# Altium PCB PCB_KeyScreen.PcbDoc
Units mil, origin at the board's own origin, x right, y up, seen from the top; angles counter-clockwise.
Board outline 2430 x 3975 mil, 2 copper layers (Top Layer, Bottom Layer); 34 components, 26 nets, 148 pads, 12 vias.
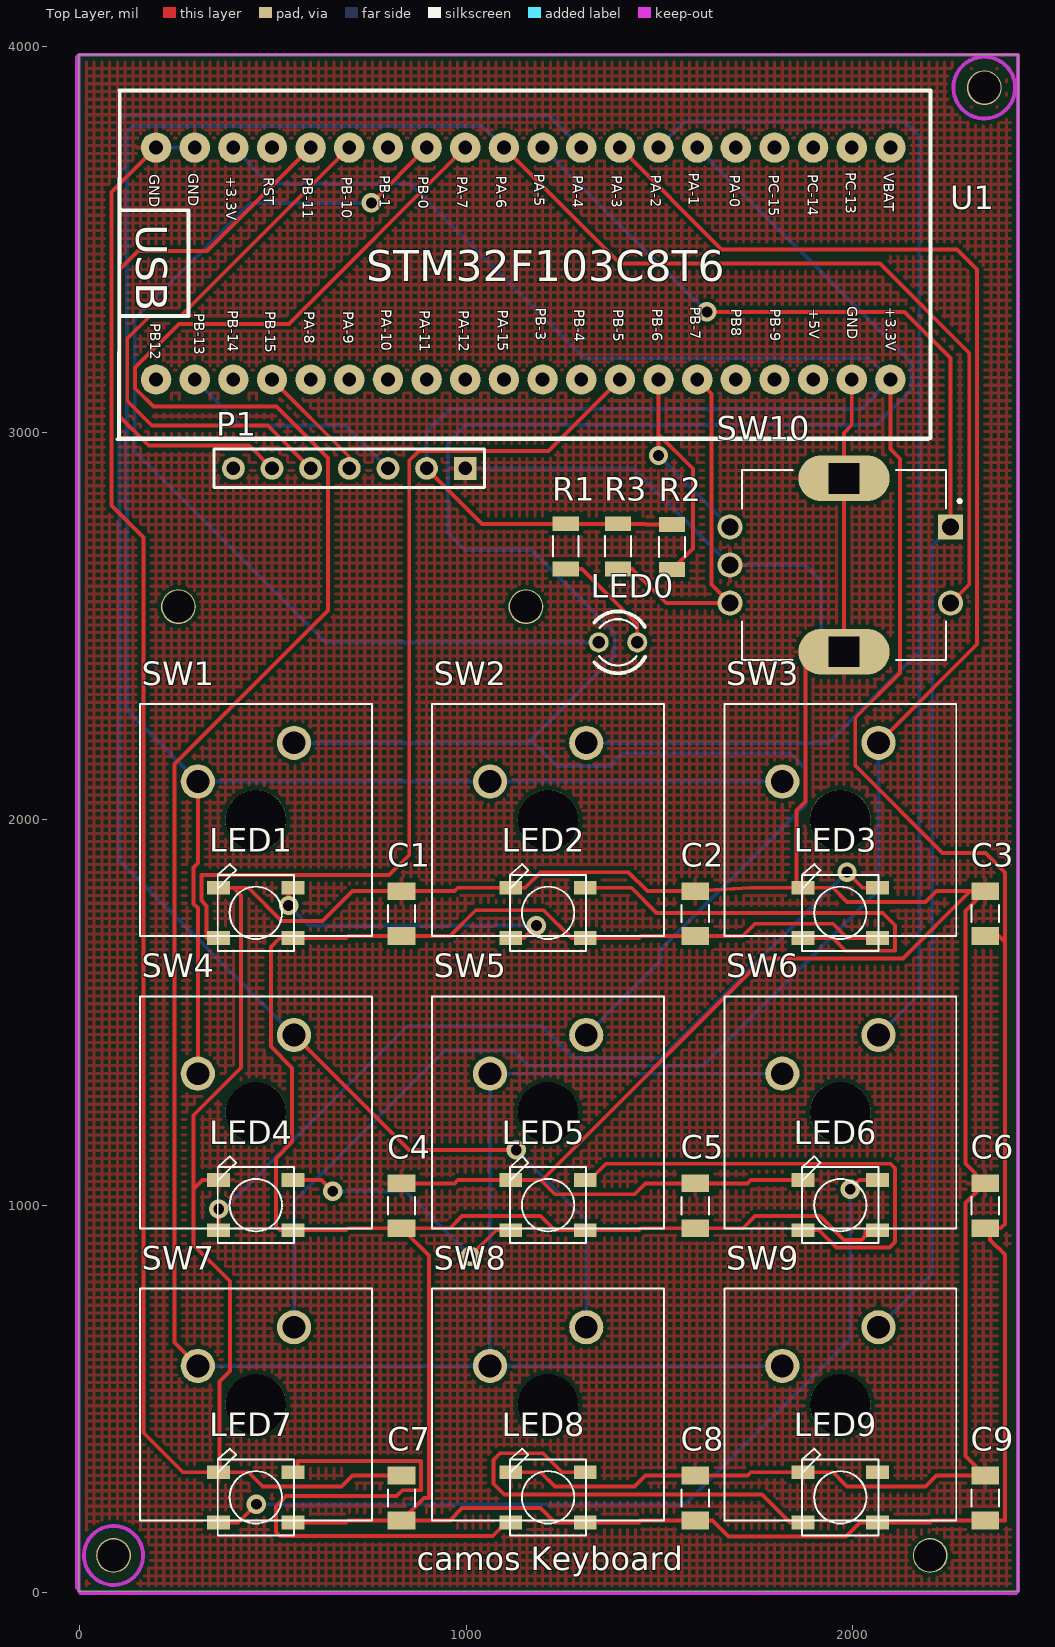
[diagram p0: Top Layer view]
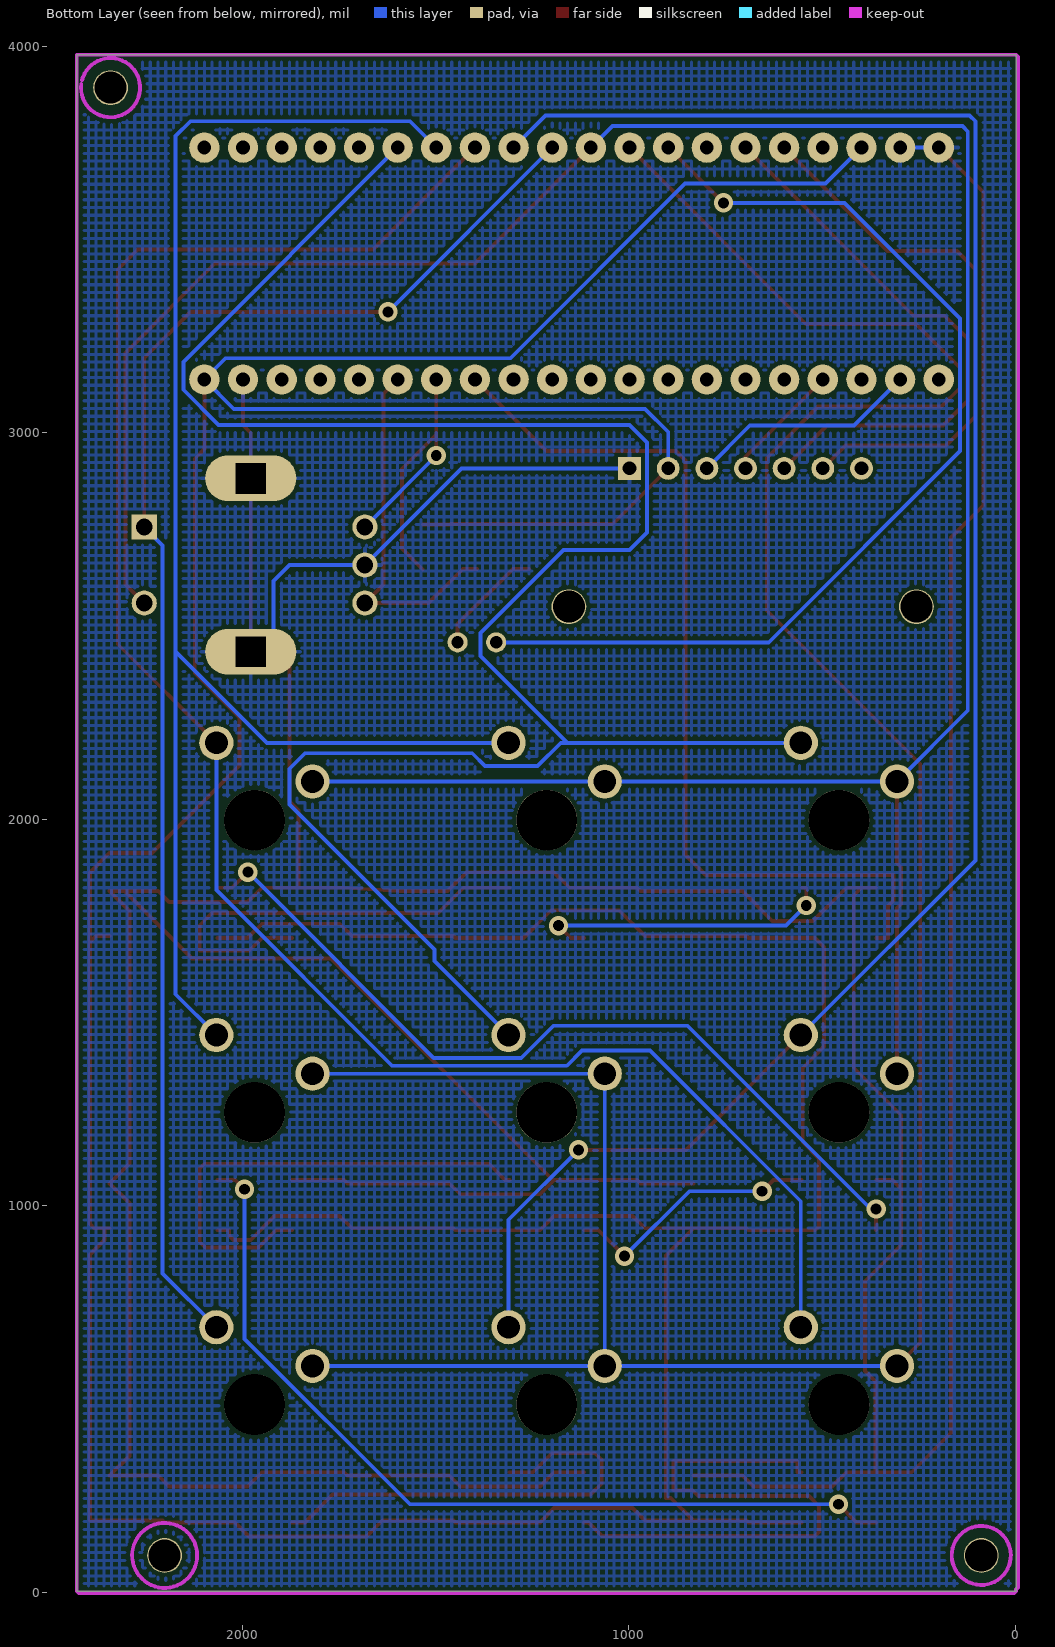
[diagram p1: Bottom Layer view, seen from below]
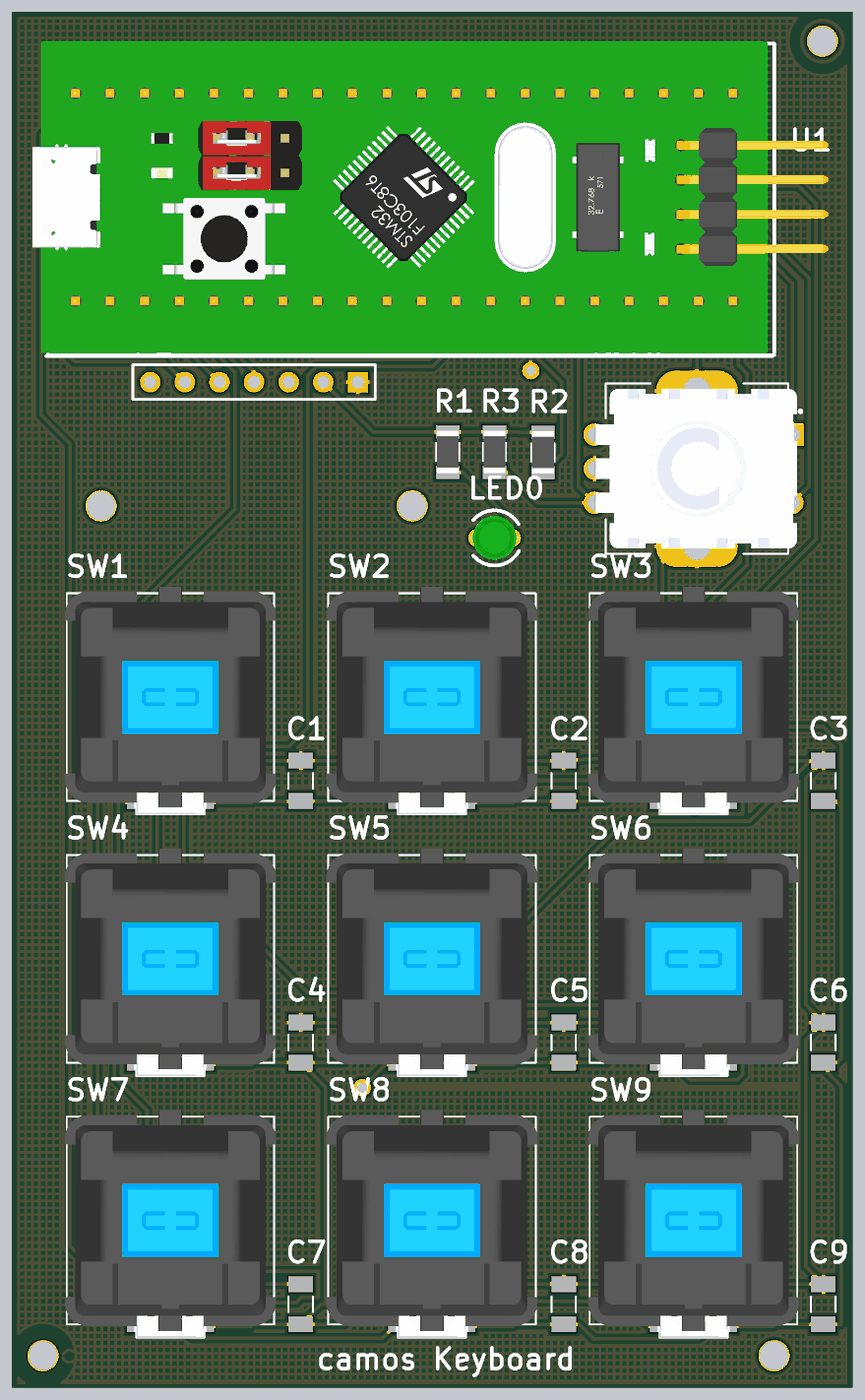
[diagram p2: 3D render of the assembled board from above, using the file's embedded part models]

## Layer stack, top to bottom
Top Solder: solder mask 0.4, Solder Resist, Dk 3.5
Top Layer: signal copper 1.4
Dielectric 1: dielectric 12.6, FR-4, Dk 4.8
Bottom Layer: signal copper 1.4
Bottom Solder: solder mask 0.4, Solder Resist, Dk 3.5

## Board outline
-2.5,2.5 -2.5,3977.5 2427.5,3977.5 2427.5,2.5
board region "Default Layer Stack Region": -2.5,2.5 -2.5,3977.5 2427.5,3977.5 2427.5,2.5
board region "Default Layer Stack Region": -2.5,2.5 -2.5,3977.5 2427.5,3977.5 2427.5,2.5
board region "Layer Stack Region 1": -2.5,2.5 -2.5,3977.5 2427.5,3977.5 2427.5,2.5

## Design rules (kind name [scope] priority, off if disabled: settings)
Clearance [All] p1: gap=10 ignorepadtopadclearanceinfootprint=FALSE except(0: Arc-Hole Track-Hole SMDPad-Hole THPad-Hole Via-Hole Fill-Hole Poly-Hole Region-Hole Text-Hole)
PolygonConnect [All] p1: connectstyle=Relief reliefconductorwidth=10 reliefentries=4 polygonreliefangle="90 Angle" airgapwidth=10
RoutingVias [All] p1: holewidth=28 width=50 viastyle="Through Hole" minholewidth=28 minwidth=50 maxholewidth=28 maxwidth=50
SolderMaskExpansion [All] p1: expansion=4 istentingtop=FALSE
Width [All] p1: maxlimit=10 minlimit=10 preferedwidth=10
30 further rules are at their usual default settings.

## Components (designator, comment, footprint, x,y, rotation, side; value= is the part's Value field where it differs from the comment)
C1 "C1206" CAPC3216X110N 832.5,1755.73 r270 top
C2 "C1206" CAPC3216X110N 1592.5,1755.73 r270 top
C3 "C1206" CAPC3216X110N 2342.5,1755.73 r270 top
C4 "C1206" CAPC3216X110N 832.5,999.73 r270 top
C5 "C1206" CAPC3216X110N 1592.5,999.73 r270 top
C6 "C1206" CAPC3216X110N 2342.5,999.73 r270 top
C7 "C1206" CAPC3216X110N 832.5,243.73 r270 top
C8 "C1206" CAPC3216X110N 1592.5,243.73 r270 top
C9 "C1206" CAPC3216X110N 2342.5,243.73 r270 top
LED0 "3mm" LED3MM 1392.5,2457.5 r180 top
LED1 "WS2812B" WS2812B 455.65,1757.5 r0 top
LED2 "WS2812B" WS2812B 1211.65,1757.5 r0 top
LED3 "WS2812B" WS2812B 1967.65,1757.5 r0 top
LED4 "WS2812B" WS2812B 455.65,1001.5 r0 top
LED5 "WS2812B" WS2812B 1211.65,1001.5 r0 top
LED6 "WS2812B" WS2812B 1967.65,1001.5 r0 top
LED7 "WS2812B" WS2812B 455.65,245.5 r0 top
LED8 "WS2812B" WS2812B 1211.65,245.5 r0 top
LED9 "WS2812B" WS2812B 1967.65,245.5 r0 top
P1 "Header 7" HDR1X7 997.5,2907.5 r180 top
R1 "220" RESC3116X65N 1257.5,2705.77 r270 top
R2 "10k" RESC3116X65N 1532.5,2704.23 r270 top
R3 "10k" RESC3116X65N 1392.5,2705.77 r270 top
SW1 "MX1A-11NN" CHERRY_MX1A-11NN_SWITCH 455.65,1997.5 r0 top
SW2 "MX1A-11NN" CHERRY_MX1A-11NN_SWITCH 1211.65,1997.5 r0 top
SW3 "MX1A-11NN" CHERRY_MX1A-11NN_SWITCH 1967.65,1997.5 r0 top
SW4 "MX1A-11NN" CHERRY_MX1A-11NN_SWITCH 455.65,1241.5 r0 top
SW5 "MX1A-11NN" CHERRY_MX1A-11NN_SWITCH 1211.65,1241.5 r0 top
SW6 "MX1A-11NN" CHERRY_MX1A-11NN_SWITCH 1967.65,1241.5 r0 top
SW7 "MX1A-11NN" CHERRY_MX1A-11NN_SWITCH 455.65,485.5 r0 top
SW8 "MX1A-11NN" CHERRY_MX1A-11NN_SWITCH 1211.65,485.5 r0 top
SW9 "MX1A-11NN" CHERRY_MX1A-11NN_SWITCH 1967.65,485.5 r0 top
SW10 "PEC11R-4215F-S0024" XDCR_PEC11R-4215F-S0024 1977.5,2657.5 r270 top
U1 "STM32F103C8T6_Board" PCBComponent_1 42.5,3902.5 r0 top

## Footprints (in the part's own frame and the unit in brackets; to place one, negate y for a bottom-side part, rotate by r counter-clockwise, add the part's x,y. Pads: shape width x height; smd on the part's side, far side on the other; paste and mask are expansions set on the pad)
CAPC3216X110N [mm]
  rect 1.16x1.82 smd: 1(-1.475,0) 2(1.475,0)
  silkscreen extent -0.57,-0.9 0.57,0.9
CHERRY_MX1A-11NN_SWITCH [mm]
  round 2.25 hole 1.5: P$1(2.51,5.08) P$2(-3.81,2.54)
  round 3.988 hole 3.988 unplated: ""(0,0)
  silkscreen extent -7.62,-7.62 7.62,7.62, body extent -7.75,-8.1 7.75,8.1, height 15.24
HDR1X7 [mm] "Connector; Header; 7 Position"
  rect 1.5x1.5 hole 0.9: 1(0,0)
  round 1.5 hole 0.9: 2(2.54,0) 3(5.08,0) 4(7.62,0) 5(10.16,0) 6(12.7,0) 7(15.24,0)
  silkscreen extent -1.27,-1.27 16.51,1.27
LED3MM [mil]
  round 52 hole 32: A(-50,0) K(50,0)
  silkscreen extent -71,-80 61,80, body extent -63,-63 63,63, height 240
PCBComponent_1 [mil]
  round 78.74 hole 35.4 paste+0 mask+2: 1(2055,-165) 2(1955,-165) 3(1855,-165) 4(1755,-165) 5(1655,-165) 6(1555,-165) 7(1455,-165) 8(1355,-165) 9(1255,-165) 10(1155,-165) 11(1055,-165) 12(955,-165) 13(855,-165) 14(755,-165) 15(655,-165) 16(555,-165) 17(455,-165) 18(355,-165) 19(255,-165) 20(155,-165) 21(155,-765) 22(255,-765) 23(355,-765) 24(455,-765) 25(555,-765) 26(655,-765) 27(755,-765) 28(855,-765) 29(955,-765) 30(1055,-765) 31(1155,-765) 32(1255,-765) 33(1355,-765) 34(1455,-765) 35(1555,-765) 36(1655,-765) 37(1755,-765) 38(1855,-765) 39(1955,-765) 40(2055,-765)
  Top Layer lines w10: 1952,-151 1960,-159
  silkscreen extent 54,-920 2158,-17, body extent 14,-911 2314,-11, height 554
RESC3116X65N [mm]
  rect 0.97x1.73 smd: 1(-1.48,0) 2(1.48,0)
  silkscreen extent -0.67,-0.85 0.67,0.85, body extent -1.55,-0.8 1.55,0.8, height 0.65
WS2812B [mm]
  rect 1.5x0.9 smd: 1-VDD(2.45,-1.65) 2-DOUT(2.45,1.65) 3-GND(-2.45,1.65) 4-DIN(-2.45,-1.65)
  silkscreen extent -2.5,-2.5 2.5,3.2, body extent -2.7,-2.5 2.7,2.5, height 1.62
XDCR_PEC11R-4215F-S0024 [mm]
  rect 1.65x1.65 hole 1.1: 1(-2.5,7)
  round 1.65 hole 1.1: 2(2.5,7) A(-2.5,-7.5) B(2.5,-7.5) COM(0,-7.5)
  oval 3x6 hole 2 square: S1(-5.7,0) S2(5.7,0)
  silkscreen extent -6.25,-6.7 6.25,7.7, body extent -5.85,-7.5 5.85,7.35, height 26.6

## Part data
C1 C2 C3 C4 C5 C6 C7 C8 C9: library part C1206C105K5RACTU, "1ÂµF Â±10% 50V Ceramic Capacitor X7R 1206 _3216 Metric_", Package="3216 KEMET", Digi-Key_Part_Number=399-8147-1-ND, Digi-Key_Purchase_URL=https://www.digikey.com/product-detail/en/kemet/C1206C105K5RACTU/399-8147-1-ND/3471870?utm_source=snapeda&utm_medium=aggregator&utm_campaign=symbol, MF=KEMET, MP=C1206C105K5RACTU, SnapEDA_Link=https://www.snapeda.com/parts/C1206C105K5RACTU/KEMET/view-part/357507/?ref=snap
LED0: library part TLLG4400, "Green 569nm LED Indication - Discrete 1.9V Radial", Package=None, Availability="In Stock", Check_prices=https://www.snapeda.com/parts/TLLG4400/Vishay/view-part/?ref=eda, MF="Vishay Semiconductors", MP=TLLG4400, Price=None, Purchase-URL=https://pricing.snapeda.com/search/part/TLLG4400/?ref=eda, SnapEDA_Link=https://www.snapeda.com/parts/TLLG4400/Vishay/view-part/?ref=snap
LED1 LED2 LED3 LED4 LED5 LED6 LED7 LED8 LED9: "Raspberry Pi HAT _40 pin_ Wheeled Robotics Kit", Package=None, Availability=Unavailable, MF="SparkFun Electronics", MP=WS2812B, Price=None, SnapEDA_Link=https://www.snapeda.com/parts/WS2812B/Worldsemi/view-part/1038297/?ref=snap
P1: "Header, 7-Pin", LatestRevisionDate=17-Jul-2002, LatestRevisionNote="Re-released for DXP Platform.", Publisher="Altium Limited"
R1 R2 R3: library part Res-SMD, "Resistor", Manufacturer="Generic Components", Class=Passive, Published=08/06/2000, Publisher="Altium Hobart Technology Centre"
SW1 SW2 SW3 SW4 SW5 SW6 SW7 SW8 SW9: "Pushbutton Switch SPST-NO Keyswitch Panel Mount, Front", Package=None, Availability="In Stock", Check_prices=https://www.snapeda.com/parts/MX1A-11NN/Cherry/view-part/?ref=eda, MF=Cherry, MP=MX1A-11NN, Price=None, Purchase-URL=https://pricing.snapeda.com/search/part/MX1A-11NN/?ref=eda, SnapEDA_Link=https://www.snapeda.com/parts/MX1A-11NN/Cherry/view-part/?ref=snap
SW10: "Incremental Encoder, 12 Mm, Contact Rating 10 Ma - 5 Vdc", Package=None, Availability=Unavailable, MP=PEC11R-4215F-S0024, Price=None
U1: library part "STM32F103C8T6_Blue pill", Manufacturer Part=STM32Duino, Contributor=Johan_a, spicePre=U, spiceSymbolName="STM32F103C8T6_Development_Board copy"

## Free pads (board coordinates)
  round 90 hole 83: 1(1154.42,2549.71) 1(2340.28,3892.5) 2(255.28,2549.71) 3(87.5,95.17) 4(2200.28,95.17)

## Via types
v1: diameter 50, hole 28, Top Layer to Bottom Layer, 12 vias

## Nets (pads, with @x,y where several pads share a name; then routed paths per layer and width w, separated by ;. In a path a pad name is that pad's centre, name@x,y a point inside that pad or via, vN(x,y) a via of type N, cw(c..) or ccw(c..) an arc to the next point about the centre after c; other vN are vias at no path point)
A1: SW1.P$1 SW5.P$1 U1.6 | length 5563
  Bottom Layer w10: SW1.P$1 1158.5,2197.5 ; SW5.P$1 1502.5,1633.53 1502.5,1662.5 1877.5,2037.5 1877.5,2130.5 1837.5,2170.5 1404.5,2170.5 1371.5,2137.5 1235.5,2137.5 1175.5,2197.5 1158.5,2197.5 ; U1.6 2151.87,3183.13 2151.87,3110.87 2060.5,3019.5 997.5,3019.5 952.5,2974.5 952.5,2741.5 997.5,2696.5 1168.5,2696.5 1383.5,2481.5 1383.5,2422.5 1158.5,2197.5
A2: SW2.P$1 SW6.P$1 U1.7 | length 4047
  Bottom Layer w10: SW2.P$1 1935.5,2197.5 2171.87,2433.87 ; U1.7 1565.5,3805.5 2133.5,3805.5 2171.87,3767.13 2171.87,2433.87 ; SW6.P$1 2171.87,1546.9 2171.87,2433.87
A3: SW3.P$1 SW7.P$1 U1.8 | length 4970.1
  Top Layer w10: U1.8 1660.85,3474.15 2269.85,3474.15 2321.5,3422.5 2321.5,2452.53 SW3.P$1
  Bottom Layer w10: SW7.P$1 554.47,1011.47 944.5,1401.5 1120.5,1401.5 1159.79,1362.21 1612.21,1362.21 2066.47,1816.47 SW3.P$1
A4: SW4.P$1 SW8.P$1 U1.9 | length 5018.8
  Top Layer w10: SW4.P$1 851.47,1144.5 v1(1129.5,1144.5)
  Bottom Layer w10: SW4.P$1 102.5,1893.47 102.5,3805.5 117.5,3820.5 1214.5,3820.5 U1.9 ; v1(1129.5,1144.5) 1310.47,963.53 SW8.P$1
A5: SW9.P$1 SW10.1 U1.10 | length 3865.9
  Top Layer w10: v1(1622.5,3312.5) 2133.5,3312.5 2253.09,3192.91 SW10.1
  Bottom Layer w10: U1.10 v1(1622.5,3312.5) ; SW9.P$1 2205.5,824.53 2205.5,2708.34 SW10.1
A6: SW1.P$2 SW2.P$2 SW3.P$2 SW4.P$2 SW10.2 U1.11 | length 7130.4
  Top Layer w10: SW4.P$2 305.65,1769.74 294.67,1780.73 294.67,1875.18 305.65,1886.16 SW1.P$2 ; U1.11 1397.5,3437.5 2070.5,3437.5 2301.5,3206.5 2301.5,2607.48 SW10.2
  Bottom Layer w10: U1.11 1041.5,3793.5 136.5,3793.5 122.5,3779.5 122.5,2280.65 SW1.P$2 SW2.P$2 SW3.P$2
A7: SW5.P$2 SW6.P$2 SW7.P$2 SW8.P$2 SW9.P$2 U1.12 | length 7280
  Top Layer w10: SW7.P$2 245.5,645.65 245.5,2142.5 642.5,2539.5 642.5,2934.5 509.5,3067.5 190.5,3067.5 143.13,3114.87 143.13,3168.13 256.5,3281.5 541.5,3281.5 U1.12
  Bottom Layer w10: SW7.P$2 SW8.P$2 ; SW9.P$2 SW8.P$2 ; SW6.P$2 SW5.P$2 1061.65,1243.65 1061.5,1243.5 1061.5,585.65 SW8.P$2
DC: P1.6 U1.16 | length 1455.5
  Top Layer w10: P1.6 438.5,2966.5 178.5,2966.5 103.13,3041.87 103.13,3422.5 150.39,3469.76 329.76,3469.76 U1.16
GND: C1.1 C2.1 C3.1 C4.1 C5.1 C6.1 C7.1 C8.1 C9.1 LED1.3-GND LED2.3-GND LED3.3-GND LED4.3-GND LED5.3-GND LED6.3-GND LED7.3-GND LED8.3-GND LED9.3-GND P1.1 SW10.COM SW10.S1 SW10.S2 U1.19 U1.20 U1.39 | length 16227.8
  Top Layer w10: U1.20 82.5,3622.5 82.5,2811.5 165.5,2728.5 165.5,412.46 267.5,310.46 LED7.3-GND LED7.3-GND@361.5,310.46 ; LED4.3-GND 317.5,1066.46 294.5,1043.46 ; LED1.3-GND 397.5,1822.46 ; C7.1 705.5,301.8 677.2,273.5 473.5,273.5 436.54,310.46 LED7.3-GND@361.5,310.46 ; C4.1 969.5,1057.8 978.16,1066.46 LED5.3-GND ; LED8.3-GND 1192.5,310.46 1229.46,273.5 1435.5,273.5 1463.8,301.8 C8.1 1727.5,301.8 1736.16,310.46 LED9.3-GND 1948.5,310.46 1985.46,273.5 2188.5,273.5 2216.8,301.8 C9.1 2291.5,352.8 2291.5,1006.8 C6.1 2291.5,1108.8 2291.5,1762.8 C3.1 2303.8,1813.8 ; LED6.3-GND 1736.16,1066.46 1727.5,1057.8 C5.1 1463.8,1057.8 1435.5,1029.5 1229.46,1029.5 1194.48,1064.48 ; U1.39 1997.5,3019.5 1977.5,2999.5 SW10.S1 SW10.S2 1877.5,2433.09 1877.5,2045.5 1854.15,2022.15 LED3.3-GND@1854.15,1822.46 ; 294.5,1043.46 294.5,1233.99 417.5,1356.99 417.5,1802.46 397.5,1822.46 ; 294.5,1043.46 294.5,898.5 388.5,804.5 388.5,571.99 361.5,544.99 LED7.3-GND@361.5,310.46 ; 397.5,1822.46 436.54,1822.46 522.5,1736.5 628.2,1736.5 705.5,1813.8 C1.1 969.5,1813.8 978.16,1822.46 LED2.3-GND 1152.46,1822.46 1192.5,1862.5 1419.8,1862.5 1468.5,1813.8 C2.1 1736.16,1822.46 LED3.3-GND@1854.15,1822.46 ; LED5.3-GND 1194.48,1064.48 ; LED5.3-GND 1192.5,1066.46 1194.48,1064.48 ; 1194.48,1064.48 1769.5,1639.5 2129.5,1639.5 2303.8,1813.8 ; LED3.3-GND@1854.15,1822.46 LED3.3-GND 1948.5,1822.46 1985.46,1785.5 2188.5,1785.5 2216.8,1813.8 2303.8,1813.8
  Bottom Layer w10: U1.20 U1.19 ; P1.1 1432.22,2907.5 SW10.COM 1877.5,2657.5 1918.5,2616.5 1918.5,2433.09 SW10.S2
LED: LED0.K U1.13 | length 2686.1
  Top Layer w10: v1(754.5,3594.5) U1.13
  Bottom Layer w10: v1(754.5,3594.5) 441.5,3594.5 142.5,3295.5 142.5,2952.5 637.5,2457.5 LED0.K
NetLED0_A: LED0.A R1.2 | length 291.2
  Top Layer w10: R1.2 1299.5,2647.5 1442.5,2504.5 LED0.A
NetLED1_2-DOUT: LED1.2-DOUT LED2.4-DIN | length 799.6
  Top Layer w10: v1(540.5,1776.5) 540.5,1822.46 LED1.2-DOUT ; LED2.4-DIN 1149.54,1692.54 v1(1181.5,1724.5)
  Bottom Layer w10: v1(540.5,1776.5) 592.5,1724.5 v1(1181.5,1724.5)
NetLED2_2-DOUT: LED2.2-DOUT LED3.4-DIN | length 1159.5
  Top Layer w10: LED2.2-DOUT 1427.54,1822.46 1492.5,1757.5 2077.5,1757.5 2109.5,1725.5 2109.5,1659.5 1981.54,1659.5 1948.5,1692.54 LED3.4-DIN
NetLED3_2-DOUT: LED3.2-DOUT LED4.4-DIN | length 2206.7
  Top Layer w10: LED4.4-DIN 359.5,936.54 v1(359.5,991.5) ; v1(1985,1863) 2025.54,1822.46 LED3.2-DOUT
  Bottom Layer w10: v1(359.5,991.5) 373.5,991.5 847.5,1465.5 1194.5,1465.5 1277.79,1382.21 1504.21,1382.21 v1(1985,1863)
NetLED4_2-DOUT: LED4.2-DOUT LED5.4-DIN | length 672.4
  Top Layer w10: LED4.2-DOUT 625.54,1066.46 v1(654.5,1037.5) ; v1(1010.5,869.54) 1077.5,936.54 LED5.4-DIN
  Bottom Layer w10: v1(654.5,1037.5) 842.54,1037.5 v1(1010.5,869.54)
NetLED5_2-DOUT: LED5.2-DOUT LED6.4-DIN | length 1276.8
  Top Layer w10: LED5.2-DOUT 1319.5,1066.46 1361.54,1108.5 2097.5,1108.5 2109.5,1096.5 2109.5,906.5 2094.66,891.66 1957.5,891.66 1912.62,936.54 LED6.4-DIN
NetLED6_2-DOUT: LED6.2-DOUT LED7.4-DIN | length 2298.6
  Top Layer w10: LED7.4-DIN 410.15,180.54 v1(457.11,227.5) ; v1(1993.5,1042.5) 2017.46,1066.46 LED6.2-DOUT
  Bottom Layer w10: v1(457.11,227.5) 1565.5,227.5 1993.5,655.5 v1(1993.5,1042.5)
NetLED7_2-DOUT: LED7.2-DOUT LED8.4-DIN | length 1522.4
  Top Layer w10: LED7.2-DOUT 563.5,310.46 563.5,339.64 883.33,339.64 883.33,263.96 834.96,263.96 819.5,248.5 533.5,248.5 507.5,222.5 507.5,155.5 517.5,145.5 1068.46,145.5 1103.5,180.54 LED8.4-DIN
NetLED8_2-DOUT: LED8.2-DOUT LED9.4-DIN | length 1169.1
  Top Layer w10: LED8.2-DOUT 1247.54,310.46 1198.5,359.5 1087.5,359.5 1070.5,342.5 1070.5,280.5 1098.5,252.5 1765.5,252.5 1837.46,180.54 LED9.4-DIN
PB6: R2.2 SW10.A U1.34 | length 866.9
  Top Layer w10: v1(1497.5,2940.65) 1497.5,2995.5 ; U1.34 1497.5,2995.5 ; R2.2 1586.5,2699.96 1586.5,2906.5 1497.5,2995.5
  Bottom Layer w10: v1(1497.5,2940.65) SW10.A
PB7: R3.2 SW10.B U1.35 | length 939.9
  Top Layer w10: R3.2 1429.07,2647.5 1517.5,2559.07 SW10.B 1634.5,2606.8 1634.5,3100.5 U1.35
RES: P1.5 U1.15 | length 1487
  Top Layer w10: P1.5 486.5,3018.5 186.5,3018.5 123.13,3081.87 123.13,3243.13 182.5,3302.5 262.5,3302.5 U1.15
SCL: P1.3 U1.22 | length 595.3
  Bottom Layer w10: U1.22 416.5,3018.5 686.5,3018.5 P1.3
SDA: P1.4 U1.24 | length 312.8
  Top Layer w10: U1.24 697.5,2937.5 P1.4
STRIP: LED1.4-DIN U1.33 | length 2410.7
  Top Layer w10: LED1.4-DIN 328.5,1692.54 328.5,1775.67 314.67,1789.5 314.67,1855.5 800.5,1855.5 852.5,1907.5 852.5,2927.5 877.5,2952.5 1212.5,2952.5 U1.33
VCC: C1.2 C2.2 C3.2 C4.2 C5.2 C6.2 C7.2 C8.2 C9.2 LED1.1-VDD LED2.1-VDD LED3.1-VDD LED4.1-VDD LED5.1-VDD LED6.1-VDD LED7.1-VDD LED8.1-VDD LED9.1-VDD P1.2 R1.1 R2.1 R3.1 U1.18 U1.40 | length 14160.8
  Top Layer w10: LED7.1-VDD 689.5,180.54 694.62,185.66 C7.2 ; P1.2 1040.96,2764.04 R1.1 R3.1 1461.5,2764.04 1463.04,2762.5 R2.1 ; LED6.1-VDD 2033.27,936.54 2033.27,922.5 2022.44,911.66 1977.5,911.66 1915.66,973.5 1747.5,973.5 1715.66,941.66 C5.2 1452.62,941.66 1447.5,936.54 LED5.1-VDD 1229.5,936.54 1192.54,973.5 989.5,973.5 957.66,941.66 C4.2 ; LED3.1-VDD 1985.46,1692.54 1948.5,1729.5 1747.34,1729.5 1715.5,1697.66 C2.2 1452.62,1697.66 1447.5,1692.54 LED2.1-VDD 1271.93,1692.54 1199.97,1764.5 1024.5,1764.5 957.66,1697.66 C1.2 694.62,1697.66 689.5,1692.54 LED1.1-VDD 517.5,1692.54 494.5,1669.54 494.5,1411.5 549.5,1356.5 549.5,1164.5 507.5,1122.5 507.5,946.54 517.5,936.54 LED4.1-VDD 689.5,936.54 694.62,941.66 C4.2 ; U1.40 2097.5,2957.5 2122.5,2932.5 2122.5,2378.5 2006.5,2262.5 2006.5,2138.5 2232.5,1912.5 2343.5,1912.5 2393.5,1862.5 2393.5,1682.5 ; C6.2 C6.2@2355.5,941.66 ; C3.2 2378.34,1697.66 2393.5,1682.5 ; C7.2 890.81,243.96 903.33,243.96 903.33,870.83 C4.2 ; C7.2 957.66,185.66 989.5,217.5 1192.54,217.5 1229.5,180.54 LED8.1-VDD 1447.5,180.54 1452.62,185.66 C8.2 1637.34,185.66 1678.5,144.5 1982.46,144.5 2018.5,180.54 LED9.1-VDD 2200.5,180.54 2205.62,185.66 C9.2 2393.5,185.66 2393.5,873.5 2355.5,911.5 C6.2@2355.5,941.66 ; C6.2@2355.5,941.66 2382.66,941.66 2393.5,952.5 2393.5,1682.5
  Bottom Layer w10: U1.18 490.5,3644.5 853.9,3644.5 1305.9,3192.5 2042.5,3192.5 U1.40 2021.5,3061.5 957.5,3061.5 897.5,3001.5 P1.2
pads on no net: LED9.2-DOUT P1.7 SW1. SW2. SW3. SW4. SW5. SW6. SW7. SW8. SW9. U1.1 U1.2 U1.3 U1.4 U1.5 U1.14 U1.17 U1.21 U1.23 U1.25 U1.26 U1.27 U1.28 U1.29 U1.30 U1.31 U1.32 U1.36 U1.37 U1.38

## Polygon pours and split planes (outlines as drawn)
GND on Top Layer "GND_TOP" (hatched 90Degree grid 20 track 8, pour order 4): -2.5,2.5 -2.5,3977.5 2427.5,3977.5 2427.5,2.5
GND on Bottom Layer "GND_BOT" (hatched 90Degree grid 20 track 8, pour order 5): -2.5,2.5 -2.5,3977.5 2427.5,3977.5 2427.5,2.5

## Keep-outs
Top Layer:
  lines w10: 2419.95,3887.65 cw(c2340.28,3892.5) 2420.1,3892.5 ; -2.5,2.5 2.5,-2.5 2422.5,-2.5 2427.5,2.5 2427.5,3977.5 -2.5,3977.5 -2.5,2.5
Bottom Layer:
  lines w10: 2284.01,102.21 ccw(c2200.28,95.17) 2284.27,97.55 ; 2414.26,3911.66 ccw(c2340.28,3892.5) 2416.07,3902.31
Keep-Out Layer:
  lines w10: 163.87,92.45 cw(c87.5,95.17) 163.92,95.17 ; -7.5,12.5 -2.5,7.5 -2.5,2.5 2.5,-2.5 2422.5,-2.5 2427.5,2.5 2427.5,3977.5 -2.5,3977.5 -7.5,3972.5 -7.5,12.5

## Silkscreen, mask and mechanical layers (free items; w line width, h text height)
Top Overlay:
  text "camos Keyboard" at 872.5,57.5 h60

## Text inside footprints (layer, text, board x,y; h text height)
U1: Top Overlay "VBAT" at 2080.72,3672.5 h27.56 r270; Top Overlay "PC-13" at 1981.72,3673.5 h27.56 r270; Top Overlay "PC-14" at 1883.72,3668.5 h27.56 r270; Top Overlay "PC-15" at 1782.72,3667.5 h27.56 r270; Top Overlay "PA-0" at 1681.72,3667.5 h27.56 r270; Top Overlay "PA-1" at 1575.72,3672.5 h27.56 r270; Top Overlay "PA-2" at 1477.72,3667.5 h27.56 r270; Top Overlay "PA-3" at 1376.72,3666.5 h27.56 r270; Top Overlay "PA-4" at 1275.72,3666.5 h27.56 r270; Top Overlay "PA-5" at 1175.72,3669.5 h27.56 r270; Top Overlay "PA-6" at 1077.72,3664.5 h27.56 r270; Top Overlay "PA-7" at 976.72,3663.5 h27.56 r270; Top Overlay "PB-0" at 875.72,3663.5 h27.56 r270; Top Overlay "PB-1" at 775.72,3666.5 h27.56 r270; Top Overlay "PB-10" at 677.72,3661.5 h27.56 r270; Top Overlay "PB-11" at 576.72,3660.5 h27.56 r270; Top Overlay "RST" at 475.72,3660.5 h27.56 r270; Top Overlay "+3.3V" at 378.72,3663.5 h27.56 r270; Top Overlay "GND" at 280.72,3671.5 h27.56 r270; Top Overlay "GND" at 179.72,3668.5 h27.56 r270; Top Overlay "+3.3V" at 2084.72,3325.5 h27.56 r270; Top Overlay "GND" at 1985.72,3326.5 h27.56 r270; Top Overlay "+5V" at 1887.72,3321.5 h27.56 r270; Top Overlay "PB-9" at 1786.72,3320.5 h27.56 r270; Top Overlay "PB8" at 1685.72,3320.5 h27.56 r270; Top Overlay "PB-7" at 1579.72,3325.5 h27.56 r270; Top Overlay "PB-6" at 1481.72,3320.5 h27.56 r270; Top Overlay "PB-5" at 1380.72,3319.5 h27.56 r270; Top Overlay "PB-4" at 1279.72,3319.5 h27.56 r270; Top Overlay "PB-3" at 1179.72,3322.5 h27.56 r270; Top Overlay "PA-15" at 1081.72,3317.5 h27.56 r270; Top Overlay "PA-12" at 980.72,3316.5 h27.56 r270; Top Overlay "PA-11" at 879.72,3316.5 h27.56 r270; Top Overlay "PA-10" at 779.72,3319.5 h27.56 r270; Top Overlay "PA-9" at 681.72,3314.5 h27.56 r270; Top Overlay "PA-8" at 580.72,3313.5 h27.56 r270; Top Overlay "PB-15" at 479.72,3313.5 h27.56 r270; Top Overlay "PB-14" at 382.72,3316.5 h27.56 r270; Top Overlay "PB-13" at 296.72,3309.5 h27.56 r270; Top Overlay "PB12" at 182.72,3283.5 h27.56 r270; Top Overlay "STM32F103C8T6" at 741.5,3391.5 h80; Top Overlay "USB" at 146.9,3539.5 h80 r270